# Altium PCB 1.8A.PcbDoc
Units mm, origin at the board's own origin, x right, y up, seen from the top; angles counter-clockwise.
Board outline 82 x 30 mm, 2 copper layers (Top Layer, Bottom Layer); 30 components, 31 nets, 90 pads, 46 vias.
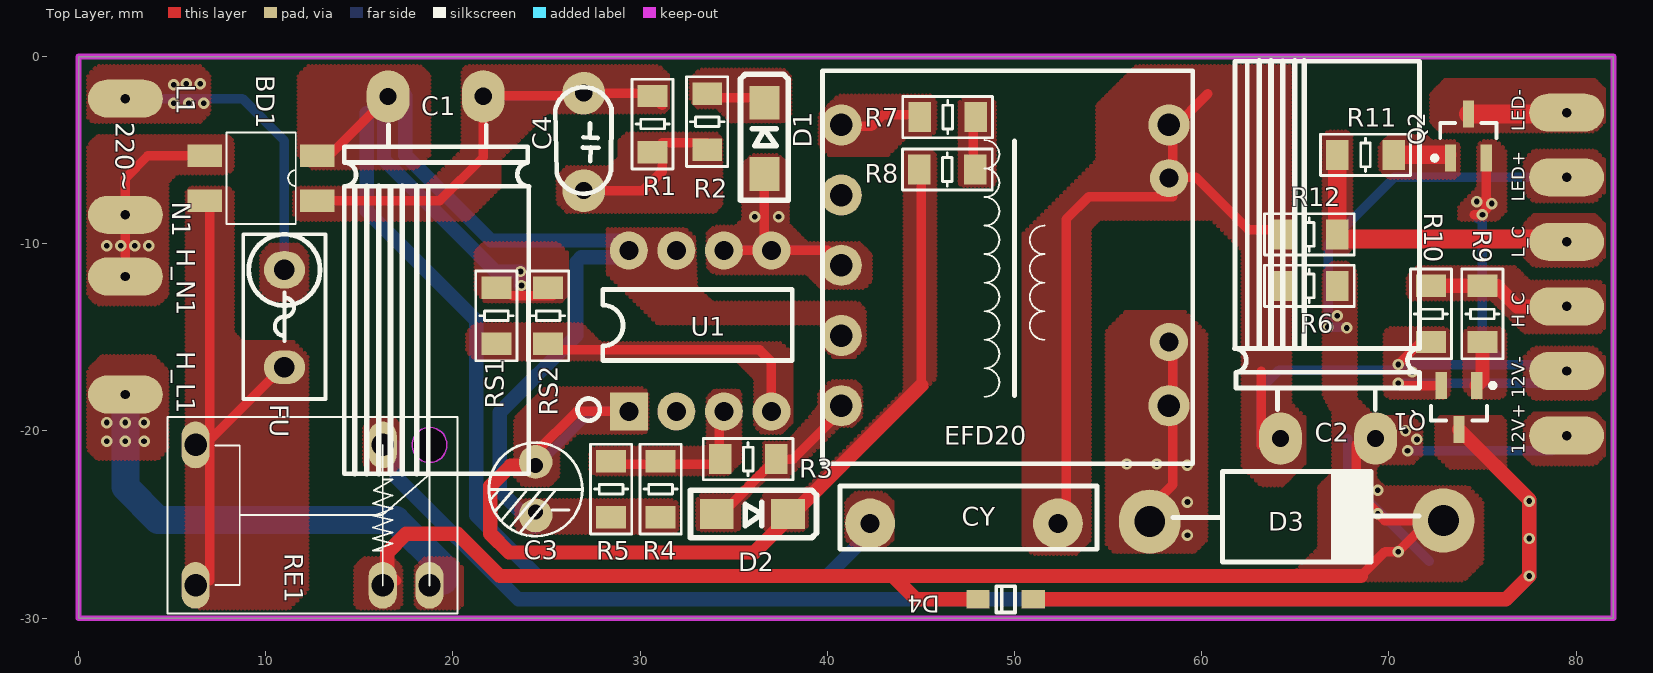
[diagram p0: Top Layer view]
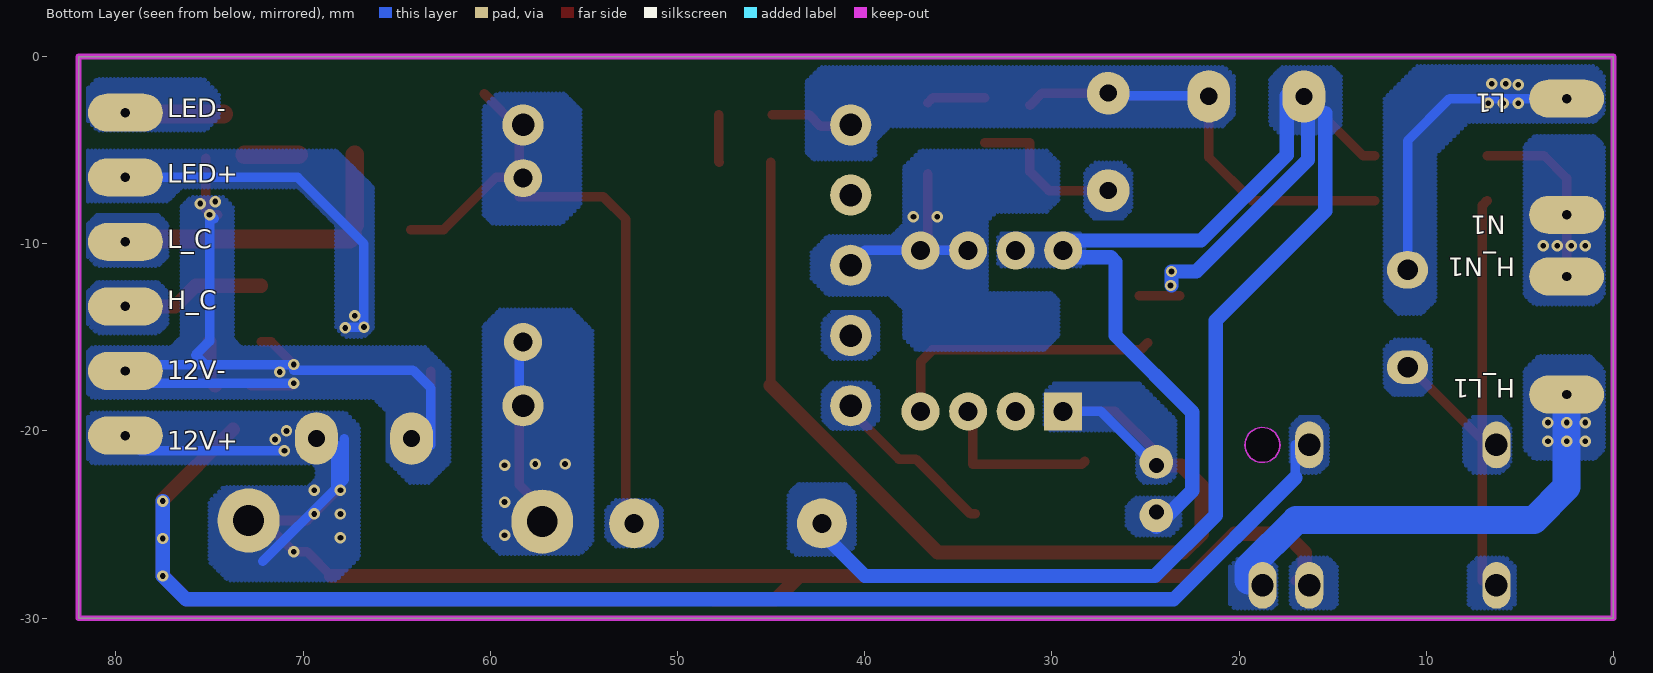
[diagram p1: Bottom Layer view, seen from below]

## Layer stack, top to bottom
Top Solder: solder mask 0.0102, Solder Resist, Dk 3.5
Top Layer: signal copper 0.0356
Dielectric 1: dielectric 0.32, FR-4, Dk 4.8
Bottom Layer: signal copper 0.0356
Bottom Solder: solder mask 0.0102, Solder Resist, Dk 3.5

## Board outline
0,-30 82,-30 82,0 0,0

## Design rules (kind name [scope] priority, off if disabled: settings)
Clearance [All] p1: gap=0.254 ignorepadtopadclearanceinfootprint=FALSE except(0: Arc-Hole Track-Hole SMDPad-Hole THPad-Hole Via-Hole Fill-Hole Poly-Hole Region-Hole Text-Hole)
PolygonConnect [All] p1: connectstyle=Direct reliefconductorwidth=0.254 reliefentries=4 polygonreliefangle="90 Angle" airgapwidth=0.254
RoutingVias [All] p1: holewidth=0.711 width=1.27 viastyle="Through Hole" minholewidth=0.305 minwidth=0.61 maxholewidth=0.711 maxwidth=1.27
ShortCircuit [All] p1: allowed=TRUE
SolderMaskExpansion [All] p1: expansion=0.102
Width [All] p1: maxlimit=10 minlimit=0.1 preferedwidth=0.254
29 further rules are at their usual default settings.

## Components (designator, comment, footprint, x,y, rotation, side; value= is the part's Value field where it differs from the comment)
BD1 "ABS10" MBL10S 9.75,-6.5 r270 top
C1 "10uF/400V" 电解电容10*13mm 19.08,-2.132 r180 top
C2 "1000uF/16V" 电解电容10*13mm 66.75,-20.404 r0 top
C3 "10uF/50V" 直插电解电容5*11mm 24.419,-23.088 r90 top
C4 "102/1KV" CAP 30.293,-4.943 r90 top
CY "222M/400v" 222M/400v 47.303,-24.945 r0 top
D1 "RS1MF" SMAF 36.635,-4.371 r270 top
D2 "RS1MF" SMAF 36,-24.437 r180 top
D3 "SR5100" DO-201AD/SR5100 65.071,-24.818 r0 top
D4 "FR107" SOD123 51,-29 r0 top
EFD20 "变压器" EFD20 49.75,-11.154 r0 top
FU "3A方块保险丝" 方块保险丝 11,-14 r270 top
Q1 "AO3400" SOT_23_N-MOS 73.75,-18.75 r180 top
Q2 "AO3400" SOT_23_N-MOS 74.25,-4.25 r0 top (schematic designator Q1)
R1 "100K/1206/±5%" R1206 30.666,-3.609 r90 top
R2 "33Ω/1206/±5%" R1206 33.587,-3.482 r90 top
R3 "27K/1206/±5%" R1206 35.77,-21.51 r0 top
R4 "4.7K/1206/±5%" R1206 31.1,-23.11 r90 top
R5 "Comment" R1206 28.452,-23.11 r90 top
R6 "4.7K/1206/±5%" R1206 65.75,-12.25 r180 top
R7 "Comment" R1206 46.431,-3.234 r0 top
R8 "Comment" R1206 46.414,-6.034 r0 top
R9 "100Ω/1206/±5%" R1206 75,-13.75 r270 top
R10 "10K/1206/±5%" R1206 72.25,-13.75 r90 top
R11 "100Ω/1206/±5%" R1206 68.75,-5.25 r0 top
R12 "10K/1206/±5%" R1206 65.75,-9.5 r180 top
RE1 "继电器" HKE_HRS1_DC12v 12.5,-24.5 r0 top locked
RS1 "1.4Ω/0805/±5%" R1206 22.324,-13.852 r90 top
RS2 "1.4Ω/0805/±5%" R1206 25.091,-13.852 r90 top
U1 "PN8370NEC-T1H" DIP-8 33.206,-14.658 r90 top

## Footprints (in the part's own frame and the unit in brackets; to place one, negate y for a bottom-side part, rotate by r counter-clockwise, add the part's x,y. Pads: shape width x height; smd on the part's side, far side on the other; paste and mask are expansions set on the pad)
222M/400v [mil]
  round 105 hole 40: 1(-197.5,0) 2(197.5,0)
  silkscreen extent -261,-54 280,79
CAP [mil]
  round 90 hole 36: 1(-87.5,130) 2(117.5,130)
  silkscreen extent -94,72 130,190
DIP-8 [mil]
  rect 80x80 hole 40: 1(-169.29,150)
  round 80 hole 40: 2(-169.29,50) 3(-169.29,-50) 4(-169.29,-150) 5(169.29,-150) 6(169.29,-50) 7(169.29,50) 8(169.29,150)
  silkscreen extent -189,-194 87,258
DO-201AD/SR5100 [mil]
  oval 130x135 hole 65: 1(-308.75,-1.25) 2(308.75,1.25)
  silkscreen extent -260,-86 258,104
EFD20 [mm]
  round 2.2 hole 1.2: 1(-9,7.5) 2(-9,3.75) 3(-9,0) 4(-9,-3.75) 5(-9,-7.5) 6(8.5,-7.5) 7(8.5,7.5)
  silkscreen extent -10,-10.6 9.78,10.4
HKE_HRS1_DC12v [mm]
  oval 1.5x2.5 hole 1.2: 1(-6.25,-3.75) 3(6.25,-3.75) 5(3.75,3.75) 6(-6.25,3.75) 12v(3.75,-3.75)
  Keep-Out Layer board cut-out: 5.314,3.747 5.386,3.389 5.588,3.085 5.892,2.882 6.25,2.811 6.25,2.811 6.608,2.882 6.912,3.085 7.114,3.389 7.186,3.747 7.186,3.747 7.114,4.105 6.912,4.408 6.608,4.611 6.25,4.682 6.25,4.682 5.892,4.611 5.588,4.408 5.386,4.105 5.314,3.747
  silkscreen extent -7.75,-5.25 7.75,5.25
MBL10S [mm]
  rect 1.2x1.84 smd: 1(-1.2,3) 2(-1.2,-3) 3(1.2,3) 4(1.2,-3)
  silkscreen extent -2.44,-1.85 2.46,1.85
R1206 [mm]
  rect 1.2x1.6 smd: 1(-1.5,0) 2(1.5,0)
  silkscreen extent -2.4,-1.1 2.4,1.1
SMAF [mm]
  rect 1.8x1.6 smd: 1(-1.9,0) 2(1.9,0)
  silkscreen extent -3.42,-1.27 3.31,1.27
SOD123 [mm]
  rect 1.25x1 smd: 1(0,0) 2(-2.95,0)
  silkscreen extent -1.98,-0.7 -0.98,0.7, body extent -3.37,-0.85 0.38,0.85, height 1.2
SOT_23_N-MOS [mm]
  rect 0.6x1.45 smd: 1(0,1.175) 2(-0.95,-1.175) 3(0.95,-1.175)
  silkscreen extent -1.93,-1.3 1.5,0.7, body extent -1.5,-0.7 1.5,0.7, height 1.1
方块保险丝 [mm]
  oval 2x2.2 hole 1.1: 1(-2.6,0)
  oval 1.8x2.2 hole 1.1: 2(2.6,0)
  silkscreen extent -4.5,-2.2 4.3,2.2
电解电容10*13mm [mil]
  oval 90x110 hole 36: 1(100,0.31) 2(-100,-0.31)
  silkscreen extent -197,60 192,793
直插电解电容5*11mm [mm]
  round 1.8 hole 0.8 copper offset 0.2,0: 1(1.232,0)
  round 1.8 hole 0.8 copper offset -0.2,0: 2(-1.232,0)
  silkscreen extent -2.54,-2.5 2.46,2.5

## Part data
D4: library part Diode, "Default Diode", Code_JEDEC=DO-214-AB, LatestRevisionDate=17-Jul-2002, LatestRevisionNote="Re-released for DXP Platform.", PackageDescription="DO-214-AB/SMC; 2 C-Bend Leads; Body 7.9 x 5.9 mm, inc. leads (LxW)", PackageReference=SMC, PackageVersion=Sep-1996, Published=8-Jun-2000, Publisher="Altium Limited"
Q1 Q2: library part MOSFET-N, "N-Channel MOSFET", LatestRevisionDate=17-Jul-2002, LatestRevisionNote="Re-released for DXP Platform.", PackageDescription="TO, Flat Index; 3 In-Line, Axial Leads; Body Dia. 4.6mm; Lead Dia. 0.5 mm (max)", PackageReference=E3, PackageVersion=1995/1996, Published=8-Jun-2000, Publisher="Altium Limited"

## Free pads (board coordinates)
  oval 4x2.032 hole 0.5 unplated: ""(2.5,-18.054) ""(2.5,-11.75) ""(2.5,-8.454) ""(2.5,-2.25) ""(79.5,-20.25) ""(79.5,-16.8) ""(79.5,-13.35) ""(79.5,-9.9) ""(79.5,-6.45) ""(79.5,-3)
  round 2.032 hole 1.016 unplated: ""(58.25,-15.25) ""(58.25,-6.5)

## Via types
v1: diameter 0.61, hole 0.305, Top Layer to Bottom Layer, tented both sides, 46 vias

## Nets (pads, with @x,y where several pads share a name; then routed paths per layer and width w, separated by ;. In a path a pad name is that pad's centre, name@x,y a point inside that pad or via, vN(x,y) a via of type N, cw(c..) or ccw(c..) an arc to the next point about the centre after c; other vN are vias at no path point)
1: FU.1 pad.@2.5,-2.25 | length 16.3
  Bottom Layer w0.508: pad.@2.5,-2.25 8.75,-2.25 11,-4.5 FU.1
  other v1: 5.089,-2.5 5.889,-2.5 6.689,-2.5 5.089,-1.5 5.75,-1.454 6.5,-1.454
2: BD1.3 C1.2 C4.2 EFD20.1 R1.2 R7.1 | length 32.8
  Top Layer w0.508: BD1.3 19.3,-7.7 21.62,-5.38 C1.2 ; C1.2@21.776,-2.085 27.364,-2.085 27.491,-1.958 30.523,-1.958 R1.2@31.174,-2.609 ; EFD20.1@40.962,-3.729 42.357,-3.729 42.985,-3.101 R7.1@44.931,-3.101
  Bottom Layer w0.508: C1.2@21.776,-2.085 27.364,-2.085 C4.2@27.491,-1.958
3: C4.1 R1.1 R2.1 | length 8.1
  Top Layer w0.508: C4.1@27.491,-7.165 30.158,-7.165 31.174,-6.149 31.174,-4.609 R2.1@33.587,-4.609
4: D1.1 R2.2 | length 3.2
  Top Layer w0.508: R2.2@33.587,-2.212 36.376,-2.212 D1.1
5: D1.2 EFD20.3 U1.5 U1.6 | length 15.3
  Top Layer w0.508: U1.6 U1.5 ; D1.2 36.635,-9.977 U1.5 ; EFD20.3@40.007,-10.358 U1.5
  Bottom Layer w0.508: U1.6 U1.5 EFD20.3@40.007,-10.358
  other v1: 36.127,-8.562 37.397,-8.562
6: 
7: R7.2 R8.2 | length 2.5
  Top Layer w0.508: R8.2@47.779,-5.641 47.795,-5.625 R7.2@47.795,-3.101
8: C3.1 D2.1 R8.1 U1.1 | length 57.2
  Top Layer w0.508: C3.1@24.419,-21.846 24.419,-21.159 26.62,-18.958 U1.1 ; 45.017,-17.579 R8.1@45.017,-5.641
  Top Layer w0.762: C3.1@24.419,-21.846 23.097,-21.846 22,-22.943 22,-25.5 23,-26.5 36.096,-26.5 45.017,-17.579
  Bottom Layer w0.508: C3.1@24.494,-21.846 27.382,-18.958 U1.1
9: D2.2 EFD20.5 R3.2 | length 9.2
  Top Layer w0.508: D2.2 34.343,-24.437 R3.2 38.181,-21.51 EFD20.5@40.962,-18.729
10: R3.1 R4.2 R5.2 U1.3 | length 9
  Top Layer w0.508: R5.2@28.253,-21.634 28.405,-21.786 31.1,-21.786 34.222,-21.786 34.222,-19.212 U1.3
11: 
12: RS1.1 RS2.1 U1.4 | length 15.2
  Top Layer w0.508: RS2.1@24.89,-15.29 25.274,-15.674 36.381,-15.674 37.016,-16.309 U1.4
12V: 
13: BD1.1 C1.1 C3.2 CY.1 EFD20.4 R4.1 R5.1 RS1.2 RS2.2 U1.7 U1.8 | length 109.4
  Top Layer w0.508: BD1.1 13.38,-5.3 C1.1@16.155,-2.525 ; C1.1@15.99,-2.36 C1.1@16.155,-2.525 ; C1.1@16.19,-2.56 C1.1@16.155,-2.525 ; C1.1 C1.1@16.155,-2.525 ; 23.173,-12.785 RS2.2@25.332,-12.785
  Bottom Layer w0.508: 15.397,-3.019 C1.1@16.315,-2.101 ; C1.1@16.315,-2.482 16.696,-2.101 C1.1@17.458,-2.101 ; C3.2@24.419,-25.119 C3.2 C3.2@24.419,-24.31 ; U1.8@28.87,-9.832 U1.8 U1.8@29.033,-10.721
  Bottom Layer w0.762: 15.397,-3.019 15.397,-8.25 21.25,-14.103 21.25,-24.5 24.5,-27.75 39.989,-27.75 CY.1@42.794,-24.945 ; C1.1@16.315,-2.482 16.315,-5.514 22.284,-11.483 v1(23.609,-11.483) v1@23.609,-12.234 ; C1.1@17.458,-2.101 17.458,-5.26 22.03,-9.832 U1.8@28.87,-9.832 ; C3.2@24.419,-25.119 22.5,-23.2 22.5,-19 26.602,-14.898 26.602,-10.975 26.856,-10.721 U1.8@29.033,-10.721
  other v1: 23.66,-12.234
14: BD1.4 FU.2 RE1.1 RE1.6 | length 26
  Top Layer w0.508: BD1.4 7,-7.95 RE1.6@7,-20.5 ; RE1.1@7,-28 RE1.6@7,-20.5 ; FU.2 10.9,-16.6 RE1.6@7,-20.5
15: C2.2 CY.2 EFD20.7 pad.@58.25,-6.5 pad.@79.5,-16.8 Q1.3 Q2.3 R6.2 R10.1 R12.2 | length 86.3
  Top Layer w0.508: CY.2@52.764,-24.31 52.764,-8.689 53.974,-7.479 58.462,-7.479 58.462,-6.712 58.25,-6.5 58.3,-6.45 pad.@58.462,-6.45 ; 60.318,-2 58.462,-3.856 pad.@58.462,-6.45 ; C2.2@63.178,-20.762 63.178,-16.817 ; R12.2@64.25,-9.25 62.489,-9.25 59.689,-6.45 pad.@58.462,-6.45 ; v1(70.5,-17.454) 70.621,-17.575 Q1.3 ; v1(70.5,-16.454) 71.704,-15.25 R10.1 ; 74.55,-8.454 v1(75,-8.454) 75,-8.354 v1(75.5,-7.854) 75.396,-7.75 75.2,-7.75 ; v1(74.689,-7.75) 75.2,-7.75 ; Q2.3 75.2,-7.75
  Bottom Layer w0.508: C2.2@63.178,-20.762 63.178,-17.711 64.139,-16.75 v1@70.5,-16.75 ; v1(70.5,-17.454) 78.846,-17.454 79.5,-16.8 79.154,-16.454 75.25,-16.454 ; v1(70.5,-16.454) 75.25,-16.454 ; 74.75,-8.654 74.95,-8.454 v1(75,-8.454) 75,-15.204 75.75,-15.954 75.25,-16.454
  other v1: 71.25,-16.854
16: D3.1 EFD20.6 pad.@58.25,-15.25 | length 14.4
  Top Layer w0.508: D3.1@56.479,-24.85 58.462,-22.867 pad.@58.462,-14.979
  Bottom Layer w0.508: EFD20.6@58.462,-18.729 58.462,-18.654 pad.@58.462,-14.979
  other v1: 59.241,-25.58 59.241,-23.802 59.241,-21.834 56.009,-21.77 57.609,-21.77
17: 
18: C2.1 D3.2 D4.2 pad.@79.5,-6.45 pad.@79.5,-20.25 R6.1 RE1.12v | length 114
  Top Layer w0.508: RE1.12v@16.489,-27.489 RE1.12v@17,-28 ; C2.1@68.258,-20.746 68.258,-23.258 69.786,-24.786 72.163,-24.786 v1(70.5,-26.449) 69.801,-26.449 68.5,-27.75
  Top Layer w0.762: RE1.12v@16.489,-27.489 16.489,-26.511 17.5,-25.5 20.25,-25.5 22.5,-27.75 43.5,-27.75 ; D4.2 44.75,-29 43.5,-27.75 ; 68.5,-27.75 43.5,-27.75
  Bottom Layer w0.508: v1(67.75,-14.5) 67.704,-14.454 v1(66.75,-14.454) 66.75,-10 70.3,-6.45 79.5,-6.45 pad.@80.95,-6.45 ; 67.809,-20.432 67.809,-22.62 v1@68.258,-23.069 ; C2.1@68.258,-20.746 v1@68.258,-23.069 ; v1(71,-21.054) 78.696,-21.054 79.5,-20.25 pad.@80.75,-20.25 ; 72.163,-26.975 v1@68.258,-23.069
  other v1: 68.009,-25.707 68.009,-24.437 69.401,-24.434 68.009,-23.167 69.401,-23.167 71.5,-20.454 70.889,-20 67.25,-13.854
19: BD1.2 pad.@2.5,-8.454 pad.@2.5,-11.75 | length 9
  Top Layer w0.508: pad.@2.5,-10.75 2.5,-8.454 2.5,-6.5 3.7,-5.3 BD1.2
  other v1: 1.5,-10.104 2.25,-10.104 3,-10.104 3.75,-10.104
20: 
21: pad.@2.5,-18.054 RE1.3 | length 24.4
  Bottom Layer w1.5: pad.@2.5,-18.054 v1(2.5,-19.554) v1(2.5,-20.554) 2.5,-23 4.25,-24.75 16.946,-24.75 19.5,-27.304 RE1.3@19.5,-28
  other v1: 1.5,-20.554 3.5,-20.554 1.5,-19.554 3.5,-19.554
22: D4.1 Q1.1 RE1.5 | length 105.9
  Top Layer w0.762: D4.1 76.25,-29 v1(77.5,-27.75) v1(77.5,-25.75) v1(77.5,-23.75) 77.5,-23.675 Q1.1
  Bottom Layer w0.508: 17,-22.5 RE1.5@17,-20.75
  Bottom Layer w0.762: 17,-22.5 23.5,-29 76.25,-29 v1(77.5,-27.75) v1(77.5,-25.75) v1(77.5,-23.75)
23: pad.@79.5,-13.35 R9.1 R10.2 | length 8.3
  Top Layer w0.762: R10.2 R9.1 75.75,-12.25 76.85,-13.35 79.5,-13.35 pad.@79.1,-13.75
24: Q1.2 R9.2 | length 2.4
  Top Layer w0.762: Q1.2 75,-17.275 R9.2
25: 
26: pad.@79.5,-9.9 R11.1 R12.1 | length 17.8
  Top Layer w0.762: R12.1 R12.1@67.5,-9.75 ; pad.@77.85,-9.9 79.5,-9.9 pad.@79.35,-9.75
  Top Layer w1: R12.1@67.25,-9 R11.1 ; R12.1@67.5,-9.75 pad.@79.35,-9.75
27: pad.@79.5,-3 Q2.1 | length 5.3
  Top Layer w0.508: pad.@79.425,-3.075 pad.@79.5,-3
  Top Layer w1: Q2.1 pad.@79.425,-3.075
28: Q2.2 R11.2 | length 3.1
  Top Layer w0.508: Q2.2@73.125,-5.25 Q2.2
  Top Layer w1: R11.2 Q2.2@73.125,-5.25
29: 
NewNet: 
pads on no net: EFD20.2 U1.2

## Polygon pours and split planes (outlines as drawn)
28 on Top Layer "28_L01_P202" (hatched 90Degree grid 0.2 track 0.2, remove dead copper, pour order 202): 70,-4.25 72,-4.25 72.25,-4.5 73.5,-4.5 73.75,-4.75 73.75,-6.25 73.5,-6.5 70,-6.5 69.5,-6 69.5,-4.75
18 on Top Layer "18_L01_P190" (hatched 90Degree grid 0.2 track 0.2, remove dead copper, pour order 190): 77.75,-19.05 81,-19.05 81.5,-19.55 81.5,-21.3 81,-21.8 77.75,-21.8 77.25,-21.3 77.25,-19.55
15 on Top Layer "15_L01_P188" (hatched 90Degree grid 0.2 track 0.2, remove dead copper, pour order 188): 77.75,-15.55 81,-15.55 81.5,-16.05 81.5,-17.8 81,-18.3 77.75,-18.3 77.25,-17.8 77.25,-16.05
26 on Top Layer "26_L01_P186" (hatched 90Degree grid 0.2 track 0.2, remove dead copper, pour order 186): 77.75,-8.45 81,-8.45 81.5,-8.95 81.5,-10.7 81,-11.2 77.75,-11.2 77.25,-10.7 77.25,-8.95
18 on Top Layer "18_L01_P184" (hatched 90Degree grid 0.2 track 0.2, remove dead copper, pour order 184): 77.75,-5 81,-5 81.5,-5.5 81.5,-7.25 81,-7.75 77.75,-7.75 77.25,-7.25 77.25,-5.5
27 on Top Layer "27_L01_P182" (hatched 90Degree grid 0.2 track 0.2, remove dead copper, pour order 182): 73,-1.25 81,-1.25 81.5,-1.75 81.5,-3.5 81,-4 72.75,-4 72.25,-3.5 72.25,-2
24 on Top Layer "24_L01_P180" (hatched 90Degree grid 0.2 track 0.2, remove dead copper, pour order 180): 74.25,-14.5 76,-14.5 76.25,-14.75 76.25,-18 76,-18.25 74.5,-18.25 74,-17.75 74,-14.75
15 on Top Layer "15_L01_P178" (hatched 90Degree grid 0.2 track 0.2, remove dead copper, pour order 178): 70,-14.5 73,-14.5 73.25,-14.75 73.25,-18 73,-18.25 70,-18.25 69.75,-18 69.75,-14.75
22 on Top Layer "22_L01_P176" (hatched 90Degree grid 0.2 track 0.2, remove dead copper, pour order 176): 72.75,-19.25 76,-19.25 76.25,-19.5 76.25,-21 76.25,-22 75.25,-22 73.25,-22 72.5,-21.25 72.5,-19.5
23 on Top Layer "23_L01_P174" (hatched 90Degree grid 0.2 track 0.2, remove dead copper, pour order 174): 71.5,-11.25 76.75,-11.25 77.5,-12 81.25,-12 81.75,-12.5 81.75,-14.25 81.25,-14.75 77.25,-14.75 75.5,-13 71.25,-13 71,-12.75 71,-11.75
26 on Top Layer "26_L01_P172" (hatched 90Degree grid 0.2 track 0.2, remove dead copper, pour order 172): 66.75,-4 67.75,-4 68,-4.25 68,-10.25 67.75,-10.5 66.75,-10.5 66.5,-10.25 66.5,-4.25
15 on Top Layer "15_L01_P170" (hatched 90Degree grid 0.2 track 0.2, remove dead copper, pour order 170): 75,-4.5 75.75,-4.5 76.25,-5 76.25,-8.25 75.75,-8.75 73.75,-8.75 73.75,-8 74.75,-7 74.75,-4.75
3 on Top Layer "3_L01_P012" (hatched 90Degree grid 0.2 track 0.2, remove dead copper, pour order 12): 34.349,-4.371 34.349,-7.927 33.968,-8.308 26.094,-8.308 25.586,-7.8 25.586,-6.403 26.094,-5.895 28.38,-5.895 28.888,-5.387 28.888,-4.498 29.269,-4.117 34.095,-4.117
4 on Top Layer "4_L01_P014" (hatched 90Degree grid 0.2 track 0.2, remove dead copper, pour order 14): 33.206,-0.688 37.651,-0.688 38.032,-1.069 38.032,-3.101 37.651,-3.482 34.857,-3.482 34.73,-3.355 34.095,-2.72 33.079,-2.72 32.698,-2.339 32.698,-1.196
2 on Top Layer "2_L01_P034" (hatched 90Degree grid 0.2 track 0.2, remove dead copper, pour order 34): 45.525,-2.085 40.589,-2.085 39.573,-3.101 39.573,-4.752 40.081,-5.26 43.256,-5.26 44.272,-4.244 45.525,-4.244 45.779,-3.99 45.779,-2.339
7 on Top Layer "7_L01_P036" (hatched 90Degree grid 0.2 track 0.2, remove dead copper, pour order 36): 47.303,-2.212 48.7,-2.212 48.954,-2.466 48.954,-6.784 48.827,-6.911 47.176,-6.911 47.049,-6.784 47.049,-2.466
16 on Top Layer "16_L01_P042" (hatched 90Degree grid 0.2 track 0.2, remove dead copper, pour order 42): 55.304,-26.469 59.622,-26.469 60.257,-25.834 60.257,-14.785 59.114,-13.642 55.939,-13.642 54.923,-14.658 54.923,-26.088
13 on Top Layer "13_L01_P016" (hatched 90Degree grid 0.2 track 0.2, remove dead copper, pour order 16): 32.907,-9.661 32.998,-12.311 33.85,-13.134 41.628,-13.134 42.009,-13.515 42.009,-15.507 41.461,-16.055 40.318,-16.055 39.81,-15.547 39.81,-14.531 39.556,-14.277 30.92,-14.277 28.253,-11.61 28.253,-9.197 32.426,-9.197
12 on Top Layer "12_L01_P020" (hatched 90Degree grid 0.2 track 0.2, remove dead copper, pour order 20): 26.856,-14.277 27.872,-15.293 37.524,-15.293 38.077,-15.819 38.095,-16.182 38.095,-19.548 37.524,-20.119 36.508,-20.119 36.127,-19.738 36.127,-17.198 35.111,-16.182 26.856,-16.182 21.182,-16.182 20.75,-15.75 20.75,-14.75 21.223,-14.277
8 on Top Layer "8_L01_P022" (hatched 90Degree grid 0.2 track 0.2, remove dead copper, pour order 22): 30.412,-17.96 30.412,-19.938 30.231,-20.119 26.631,-20.119 25.65,-21.1 25.65,-22.42 25.157,-22.913 23.743,-22.913 23.3,-22.47 23.3,-19.34 24.934,-17.706 30.158,-17.706
13 on Top Layer "13_L01_P070" (hatched 90Degree grid 0.2 track 0.2, remove dead copper, pour order 70): 21.73,-13.09 25.76,-13.09 26.094,-12.756 26.094,-10.467 25.586,-9.959 21.649,-9.959 21.204,-10.404 21.204,-12.565
5 on Top Layer "5_L01_P018" (hatched 90Degree grid 0.2 track 0.2, remove dead copper, pour order 18): 36,-5.26 37.397,-5.26 37.905,-5.768 37.905,-8.943 38.921,-9.959 41.715,-9.959 42.35,-10.594 42.35,-11.991 41.969,-12.372 39.683,-12.372 38.921,-11.61 33.968,-11.61 33.587,-11.229 33.587,-9.451 33.968,-9.07 35.111,-9.07 35.492,-8.689 35.492,-5.768
13 on Top Layer "13_L01_P024" (hatched 90Degree grid 0.2 track 0.2, remove dead copper, pour order 24): 23.735,-23.675 28.126,-23.675 31.765,-23.675 32.02,-23.93 32.02,-25.24 31.807,-25.453 23.633,-25.453 23.37,-25.19 23.37,-24.04
10 on Top Layer "10_L01_P026" (hatched 90Degree grid 0.2 track 0.2, remove dead copper, pour order 26): 33.968,-17.833 35.238,-17.833 35.365,-17.96 35.365,-21.635 34.67,-22.33 27.58,-22.33 27.32,-22.07 27.32,-21.11 27.55,-20.88 33.461,-20.88 33.587,-20.754 33.587,-18.214
9 on Top Layer "9_L01_P028" (hatched 90Degree grid 0.2 track 0.2, remove dead copper, pour order 28): 41.165,-17.323 41.459,-17.323 41.842,-17.706 41.842,-19.23 41.336,-19.736 40.644,-19.736 37.84,-22.54 36.71,-22.54 35.323,-23.927 35.323,-25.197 35.196,-25.324 33.164,-25.324 33.037,-25.197 33.037,-23.673 33.291,-23.419 35.083,-23.419 36.61,-21.892 36.61,-20.6 37.902,-20.6 39.556,-18.678 39.556,-17.96 40.193,-17.323
15 on Top Layer "15_L01_P044" (hatched 90Degree grid 0.2 track 0.2, remove dead copper, pour order 44): 50.986,-26.596 53.272,-26.596 54.034,-25.834 54.034,-9.197 54.542,-8.689 60.511,-8.689 62.162,-10.34 62.162,-21.912 63.163,-22.913 64.321,-22.913 65.5,-21.734 65.5,-19.25 64.75,-18.5 64.75,-0.5 56.508,-0.5 54.415,-2.593 54.415,-5.514 50.478,-9.451 50.478,-26.088
18 on Top Layer "18_L01_P102" (hatched 90Degree grid 0.2 track 0.2, remove dead copper, pour order 102): 67,-11 67.75,-11 68.25,-11.5 68.25,-18.25 69.25,-19.25 71.25,-19.25 71.75,-19.75 71.75,-21.25 71.25,-21.75 69.5,-21.75 69.286,-21.964 69.286,-22.536 69.75,-23 74.25,-23 75,-23.75 75,-27 74,-28 65,-28 65,-27.5 66.25,-26.25 66.25,-23 67,-22.25 67,-19 66.5,-18.1 66.5,-11.5
8 on Top Layer "8_L01_P040" (hatched 90Degree grid 0.2 track 0.2, remove dead copper, pour order 40): 44.255,-5.006 45.525,-5.006 45.779,-5.26 45.779,-17.198 38.54,-24.437 37.524,-24.437 44.128,-17.833 44.128,-5.133
8 on Top Layer "8_L01_P084" (hatched 90Degree grid 0.2 track 0.2, remove dead copper, pour order 84): 36.762,-23.294 38.704,-23.294 38.921,-23.511 38.921,-25.072 38.667,-25.326 36.762,-25.326 36.508,-25.072 36.508,-23.548
19 on Top Layer "19_L01_P104" (hatched 90Degree grid 0.2 track 0.2, remove dead copper, pour order 104): 1,-13.25 4.25,-13.25 4.75,-12.75 4.75,-6.75 5.25,-6.25 8,-6.25 8.25,-6 8.25,-4.5 8,-4.25 1,-4.25 0.5,-4.75 0.5,-12.75
14 on Top Layer "14_L01_P106" (hatched 90Degree grid 0.2 track 0.2, remove dead copper, pour order 106): 6,-7 8,-7 8.25,-7.25 8.25,-14.75 8.75,-15.25 11.5,-15.25 12.25,-16 12.25,-28.5 11,-29.75 6.75,-29.75 5.75,-28.75 5.75,-7.25
21 on Top Layer "21_L01_P108" (hatched 90Degree grid 0.2 track 0.2, remove dead copper, pour order 108): 1.25,-16 4,-16 4.75,-16.75 4.75,-21 4.25,-21.5 1,-21.5 0.5,-21 0.5,-16.75
1 on Top Layer "1_L01_P116" (hatched 90Degree grid 0.2 track 0.2, remove dead copper, pour order 116): 1,-0.5 6.5,-0.5 7,-1 7,-3 6.5,-3.5 0.75,-3.5 0.5,-3.25 0.5,-1
13 on Top Layer "13_L01_P118" (hatched 90Degree grid 0.2 track 0.2, remove dead copper, pour order 118): 12.5,-6 18,-6 18.75,-5.25 18.75,-1 18.25,-0.5 12.25,-0.5 11.75,-1 11.75,-5.25
2 on Top Layer "2_L01_P120" (hatched 90Degree grid 0.2 track 0.2, remove dead copper, pour order 120): 11.75,-7 18.5,-7 20.5,-5 20.5,-0.75 20.75,-0.5 31,-0.5 31.5,-1 31.5,-2.75 31.25,-3 25,-3 22.5,-5.5 22.5,-7 20.75,-8.75 11.75,-8.75 11.5,-8.5 11.5,-7.25
18 on Top Layer "18_L01_P156" (hatched 90Degree grid 0.2 track 0.2, remove dead copper, pour order 156): 16.75,-29.789 15.25,-29.789 14.75,-29.289 14.75,-27.289 15.25,-26.789 16.75,-26.789 17.25,-27.289 17.25,-29.289
21 on Top Layer "21_L01_P158" (hatched 90Degree grid 0.2 track 0.2, remove dead copper, pour order 158): 20,-29.789 18.5,-29.789 18,-29.289 18,-27.289 18.5,-26.789 20,-26.789 20.5,-27.289 20.5,-29.289
22 on Top Layer "22_L01_P160" (hatched 90Degree grid 0.2 track 0.2, remove dead copper, pour order 160): 16.711,-22.289 15.75,-22.289 15.25,-21.789 15.25,-19.789 15.75,-19.289 16.789,-19.289 17.25,-19.75 17.25,-21.75
1 on Top Layer "1_L01_P162" (hatched 90Degree grid 0.2 track 0.2, remove dead copper, pour order 162): 11.75,-13.039 10.25,-13.039 9.75,-12.539 9.75,-10.539 10.25,-10.039 11.75,-10.039 12.25,-10.539 12.25,-12.539
13 on Top Layer "13_L01_P164" (hatched 90Degree grid 0.2 track 0.2, remove dead copper, pour order 164): 43,-26.289 41.5,-26.289 41,-25.789 41,-23.789 41.5,-23.289 43,-23.289 43.5,-23.789 43.5,-25.789
18 on Bottom Layer "18_L02_P200" (hatched 90Degree grid 0.2 track 0.2, remove dead copper, pour order 200): 81.5,-5 81.5,-7.75 77.25,-7.75 76.5,-7 70.25,-7 68.25,-9 68.25,-12 68.25,-14.5 67.75,-15 66.75,-15 66.25,-14.5 66.25,-7 68.25,-5
27 on Bottom Layer "27_L02_P196" (hatched 90Degree grid 0.2 track 0.2, remove dead copper, pour order 196): 75.304,-1.196 81,-1.196 81.5,-1.696 81.5,-3.446 81,-3.946 75.196,-3.946 74.5,-3.25 74.5,-2
26 on Bottom Layer "26_L02_P194" (hatched 90Degree grid 0.2 track 0.2, remove dead copper, pour order 194): 77.75,-8.446 81,-8.446 81.5,-8.946 81.5,-10.696 81,-11.196 77.75,-11.196 77.25,-10.696 77.25,-8.946
23 on Bottom Layer "23_L02_P192" (hatched 90Degree grid 0.2 track 0.2, remove dead copper, pour order 192): 77.75,-12.046 81,-12.046 81.5,-12.546 81.5,-14.296 81,-14.796 77.75,-14.796 77.25,-14.296 77.25,-12.546
15 on Bottom Layer "15_L02_P168" (hatched 90Degree grid 0.2 track 0.2, remove dead copper, pour order 168): 74.25,-7.5 76,-7.5 76.5,-8 76.5,-14.961 77.289,-15.75 73.089,-15.75 73.75,-15.089 73.75,-8
15 on Bottom Layer "15_L02_P072" (hatched 90Degree grid 0.2 track 0.2, remove dead copper, pour order 72): 62.162,-16.838 62.162,-21.662 63.286,-22.786 64.321,-22.786 65.5,-21.607 65.5,-19 66.25,-18.25 81.25,-18.25 81.5,-18 81.5,-15.75 81.25,-15.5 63.5,-15.5
2 on Bottom Layer "2_L02_P064" (hatched 90Degree grid 0.2 track 0.2, remove dead copper, pour order 64): 20.76,-0.561 42.35,-0.561 43.112,-1.323 43.112,-3.736 43.112,-5.133 42.731,-5.514 39.683,-5.514 39.429,-5.26 39.429,-4.498 38.667,-3.736 20.887,-3.736 20.252,-3.101 20.252,-1.069
16 on Bottom Layer "16_L02_P060" (hatched 90Degree grid 0.2 track 0.2, remove dead copper, pour order 60): 55.685,-13.515 59.495,-13.515 60.384,-14.404 60.384,-25.707 59.495,-26.596 55.177,-26.596 54.542,-25.961 54.542,-14.658
18 on Bottom Layer "18_L02_P054" (hatched 90Degree grid 0.2 track 0.2, remove dead copper, pour order 54): 67.75,-19 81.25,-19 81.5,-19.25 81.5,-21.5 81.25,-21.75 69.5,-21.75 69.286,-21.964 69.286,-22.536 69.75,-23 74.25,-23 75,-23.75 75,-27 74,-28 68.25,-28 67,-26.75 67,-19.75
5 on Bottom Layer "5_L02_P052" (hatched 90Degree grid 0.2 track 0.2, remove dead copper, pour order 52): 29.65,-13.007 29.65,-14.912 30.412,-15.674 33.46,-15.674 37.27,-15.674 37.905,-15.039 37.905,-13.515 38.667,-12.753 41.969,-12.753 42.858,-11.864 42.858,-10.467 41.969,-9.578 38.54,-9.578 37.905,-8.943 37.905,-5.895 37.016,-5.006 30.285,-5.006 29.65,-5.641 29.65,-7.673 30.285,-8.308 32.952,-8.308 33.46,-8.816 33.46,-12.626 30.031,-12.626
13 on Bottom Layer "13_L02_P076" (hatched 90Degree grid 0.2 track 0.2, remove dead copper, pour order 76): 15.045,-0.561 17.712,-0.561 18.347,-1.196 18.347,-1.45 18.347,-3.609 17.839,-4.117 15.045,-4.117 14.537,-3.609 14.537,-1.069
13 on Bottom Layer "13_L02_P074" (hatched 90Degree grid 0.2 track 0.2, remove dead copper, pour order 74): 28.524,-9.434 32.679,-9.434 32.879,-9.634 32.879,-11.086 32.731,-11.234 32.487,-11.234 28.453,-11.234 28.253,-11.034 28.253,-9.705
8 on Bottom Layer "8_L02_P062" (hatched 90Degree grid 0.2 track 0.2, remove dead copper, pour order 62): 30.412,-17.96 30.412,-19.738 30.158,-19.992 26.418,-19.992 25.47,-20.94 25.47,-22.4 25.084,-22.786 23.786,-22.786 23.39,-22.39 23.39,-19.394 25.332,-17.452 29.904,-17.452
13 on Bottom Layer "13_L02_P078" (hatched 90Degree grid 0.2 track 0.2, remove dead copper, pour order 78): 23.494,-23.556 25.526,-23.556 26.034,-24.064 26.034,-25.08 25.526,-25.588 23.621,-25.588 23.113,-25.08 23.113,-23.937
15 on Bottom Layer "15_L02_P080" (hatched 90Degree grid 0.2 track 0.2, remove dead copper, pour order 80): 56.066,-1.958 59.622,-1.958 60.384,-2.72 60.384,-8.435 59.876,-8.943 56.193,-8.943 55.177,-7.927 55.177,-2.847
13 on Bottom Layer "13_L02_P082" (hatched 90Degree grid 0.2 track 0.2, remove dead copper, pour order 82): 41.021,-22.833 43.561,-22.833 44.069,-23.341 44.069,-26.262 43.688,-26.643 41.021,-26.643 40.513,-26.135 40.513,-23.341
21 on Bottom Layer "21_L02_P110" (hatched 90Degree grid 0.2 track 0.2, remove dead copper, pour order 110): 1.25,-16 4,-16 4.75,-16.75 4.75,-21 4.25,-21.5 1,-21.5 0.5,-21 0.5,-16.75
19 on Bottom Layer "19_L02_P112" (hatched 90Degree grid 0.2 track 0.2, remove dead copper, pour order 112): 1,-13.25 4.25,-13.25 4.75,-12.75 4.75,-6.75 4.75,-4.75 4.25,-4.25 1,-4.25 0.5,-4.75 0.5,-12.75
1 on Bottom Layer "1_L02_P114" (hatched 90Degree grid 0.2 track 0.2, remove dead copper, pour order 114): 1,-0.5 10.5,-0.5 12.25,-2.25 12.25,-13 11.5,-13.75 10.25,-13.75 9.5,-13 9.5,-5.25 7.75,-3.5 1,-3.5 0.5,-3 0.5,-1
14 on Bottom Layer "14_L02_P134" (hatched 90Degree grid 0.2 track 0.2, remove dead copper, pour order 134): 5.75,-26.75 7.25,-26.75 7.75,-27.25 7.75,-29.25 7.25,-29.75 5.75,-29.75 5.25,-29.25 5.25,-27.25
18 on Bottom Layer "18_L02_P136" (hatched 90Degree grid 0.2 track 0.2, remove dead copper, pour order 136): 15.25,-26.75 16.75,-26.75 17.25,-27.25 17.25,-29.25 16.75,-29.75 15.25,-29.75 14.75,-29.25 14.75,-27.25
21 on Bottom Layer "21_L02_P138" (hatched 90Degree grid 0.2 track 0.2, remove dead copper, pour order 138): 18.5,-26.75 20,-26.75 20.5,-27.25 20.5,-29.25 20,-29.75 18.5,-29.75 18,-29.25 18,-27.25
14 on Bottom Layer "14_L02_P140" (hatched 90Degree grid 0.2 track 0.2, remove dead copper, pour order 140): 6,-19.25 7.5,-19.25 8,-19.75 8,-21.75 7.5,-22.25 6,-22.25 5.5,-21.75 5.5,-19.75
22 on Bottom Layer "22_L02_P142" (hatched 90Degree grid 0.2 track 0.2, remove dead copper, pour order 142): 15.75,-19.25 16.75,-19.25 17.25,-19.75 17.25,-21.75 16.75,-22.25 15.75,-22.25 15.25,-21.75 15.25,-19.75
14 on Bottom Layer "14_L02_P144" (hatched 90Degree grid 0.2 track 0.2, remove dead copper, pour order 144): 10.25,-15.1 11.75,-15.1 12.25,-15.6 12.25,-17.6 11.75,-18.1 10.25,-18.1 9.75,-17.6 9.75,-15.6
3 on Bottom Layer "3_L02_P146" (hatched 90Degree grid 0.2 track 0.2, remove dead copper, pour order 146): 26.241,-5.665 27.741,-5.665 28.241,-6.165 28.241,-8.165 27.741,-8.665 26.241,-8.665 25.741,-8.165 25.741,-6.165
13 on Bottom Layer "13_L02_P148" (hatched 90Degree grid 0.2 track 0.2, remove dead copper, pour order 148): 39.25,-15.654 39.25,-14.154 39.75,-13.654 41.75,-13.654 42.25,-14.154 42.25,-15.654 41.75,-16.154 39.75,-16.154
9 on Bottom Layer "9_L02_P150" (hatched 90Degree grid 0.2 track 0.2, remove dead copper, pour order 150): 39.25,-19.404 39.25,-17.904 39.75,-17.404 41.75,-17.404 42.25,-17.904 42.25,-19.404 41.75,-19.904 39.75,-19.904
15 on Bottom Layer "15_L02_P152" (hatched 90Degree grid 0.2 track 0.2, remove dead copper, pour order 152): 50.819,-25.695 50.819,-24.195 51.319,-23.695 53.319,-23.695 53.819,-24.195 53.819,-25.695 53.319,-26.195 51.319,-26.195

## Keep-outs
Keep-Out Layer:
  circle w0.076: c18.75,-20.75 r0.933
  lines w0.3: 0,-30 82,-30 82,0 0,0 0,-30

## Silkscreen, mask and mechanical layers (free items; w line width, h text height)
Top Overlay:
  text "L1" at 5.25,-1.5 h1 r270
  text "220~" at 2,-3.5 h1 r270
  text "LED-" at 77.25,-4 h0.7 r90
  text "N1" at 5,-7.75 h1 r270
  text "LED+" at 77.25,-7.75 h0.7 r90
  text "H_N1" at 5.25,-10.25 h1 r270
  text "L_C" at 77.25,-10.75 h0.7 r90
  text "H_C" at 77.25,-14.5 h0.7 r90
  text "H_L1" at 5.25,-15.75 h1 r270
  text "12V-" at 77.25,-18.25 h0.7 r90
  text "12V+" at 77.25,-21.25 h0.7 r90
Bottom Overlay:
  text "L1" at 5.75,-2 h1 r180
  text "LED-" at 77.25,-3.25 h1
  text "LED+" at 77.25,-6.75 h1
  text "N1" at 5.75,-8.5 h1 r180
  text "L_C" at 77.25,-10.25 h1
  text "H_N1" at 5.25,-10.75 h1 r180
  text "H_C" at 77.25,-13.5 h1
  text "H_L1" at 5.25,-17.25 h1 r180
  text "12V-" at 77.25,-17.25 h1
  text "12V+" at 77.25,-21 h1